# Altium PCB MCS_adapter.PcbDoc
Units mil, origin at the board's own origin, x right, y up, seen from the top; angles counter-clockwise.
Board outline 2775 x 1700 mil, 4 copper layers (Top Copper Layer, Internal Copper Layer 1, Internal Copper Layer 2, Bottom Copper Layer), stack 62.205 mil thick; 13 components, 93 nets, 230 pads, 28 vias.
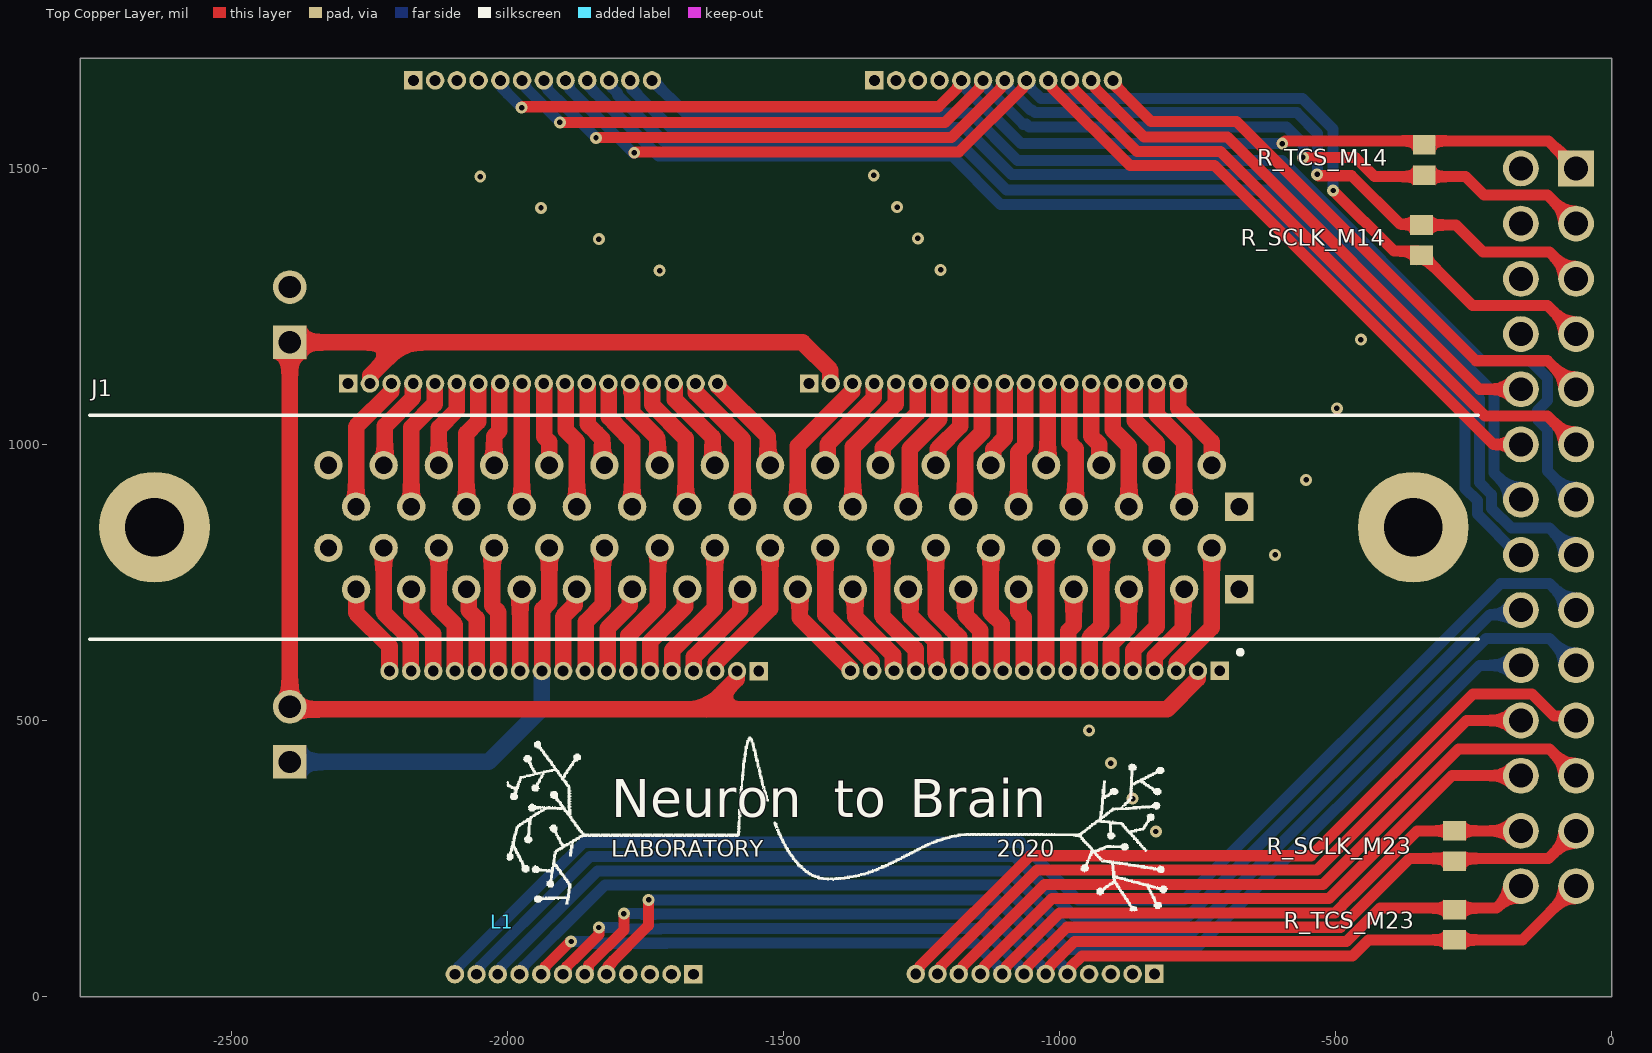
[diagram p0: Top Copper Layer view]
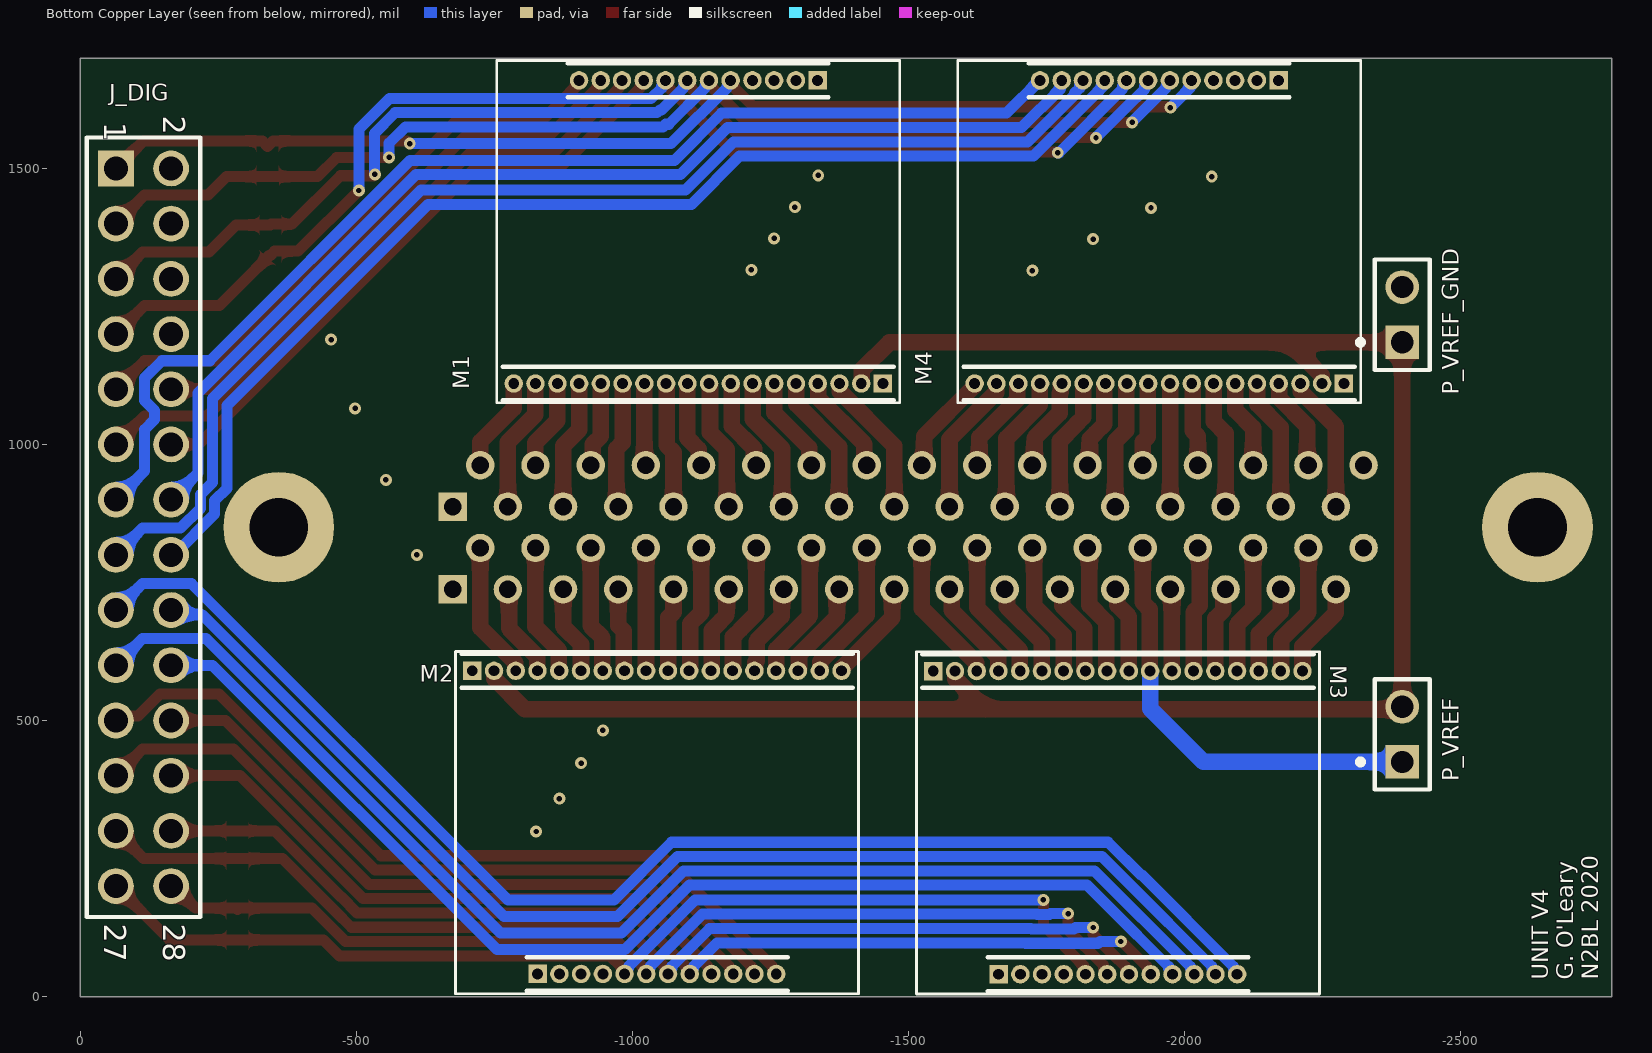
[diagram p1: Bottom Copper Layer view, seen from below]
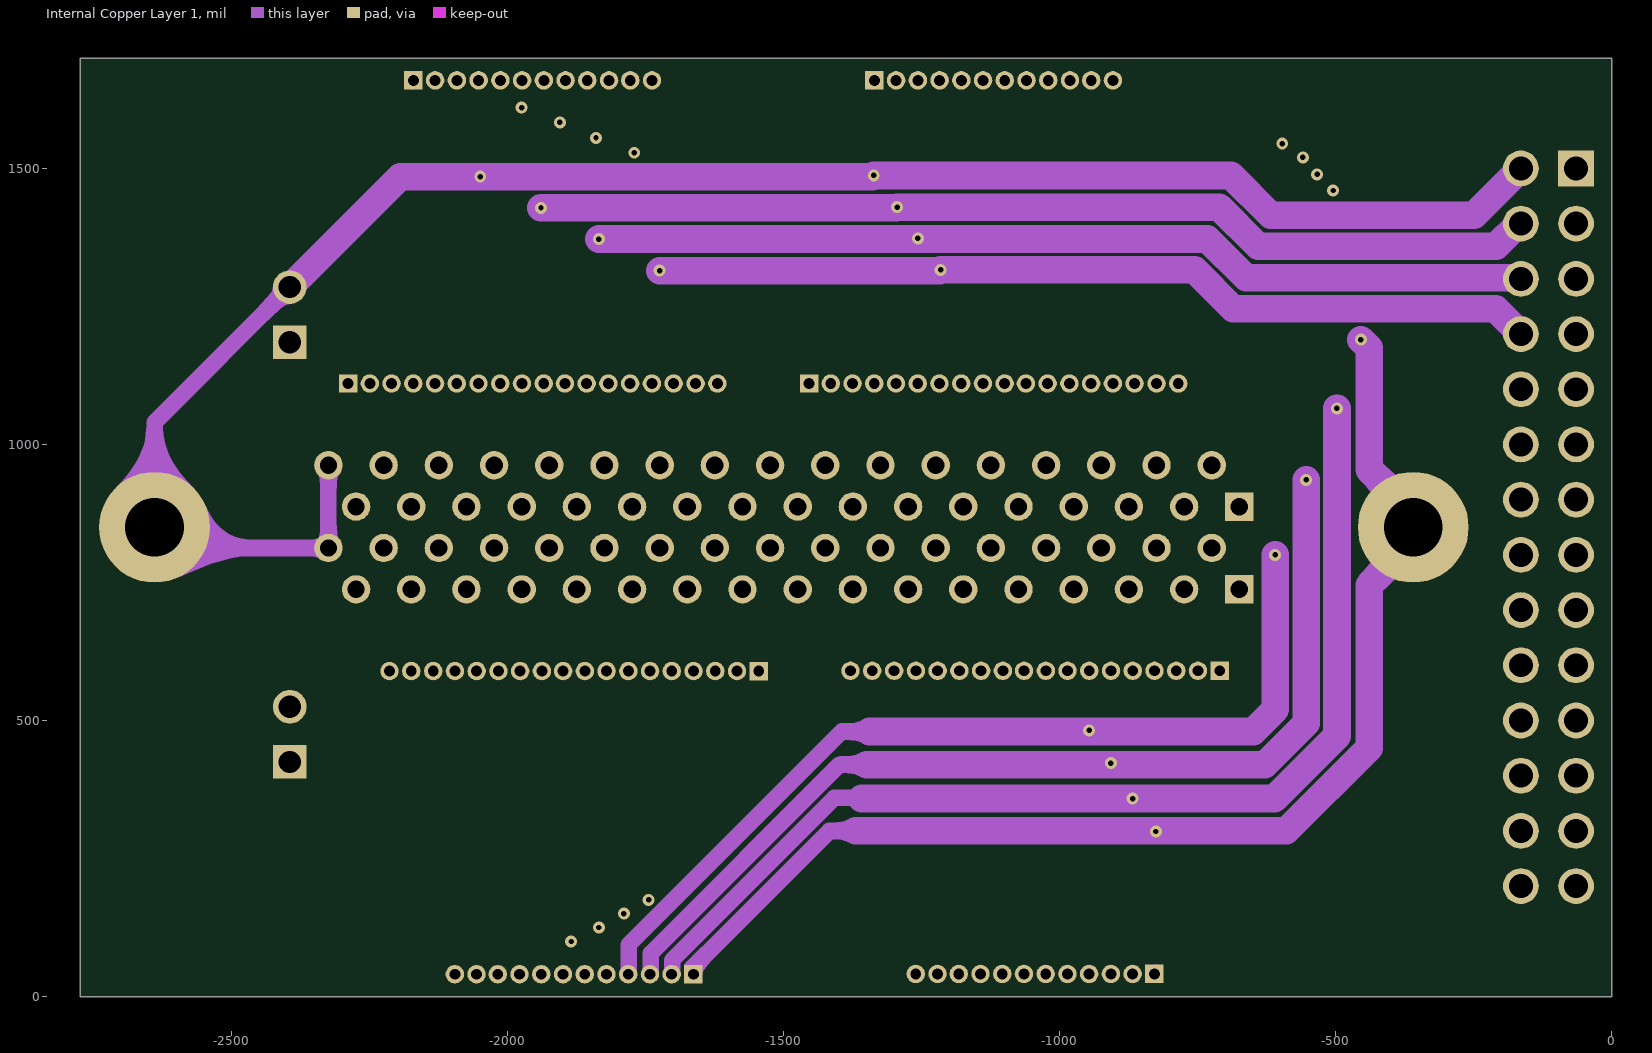
[diagram p2: Internal Copper Layer 1]
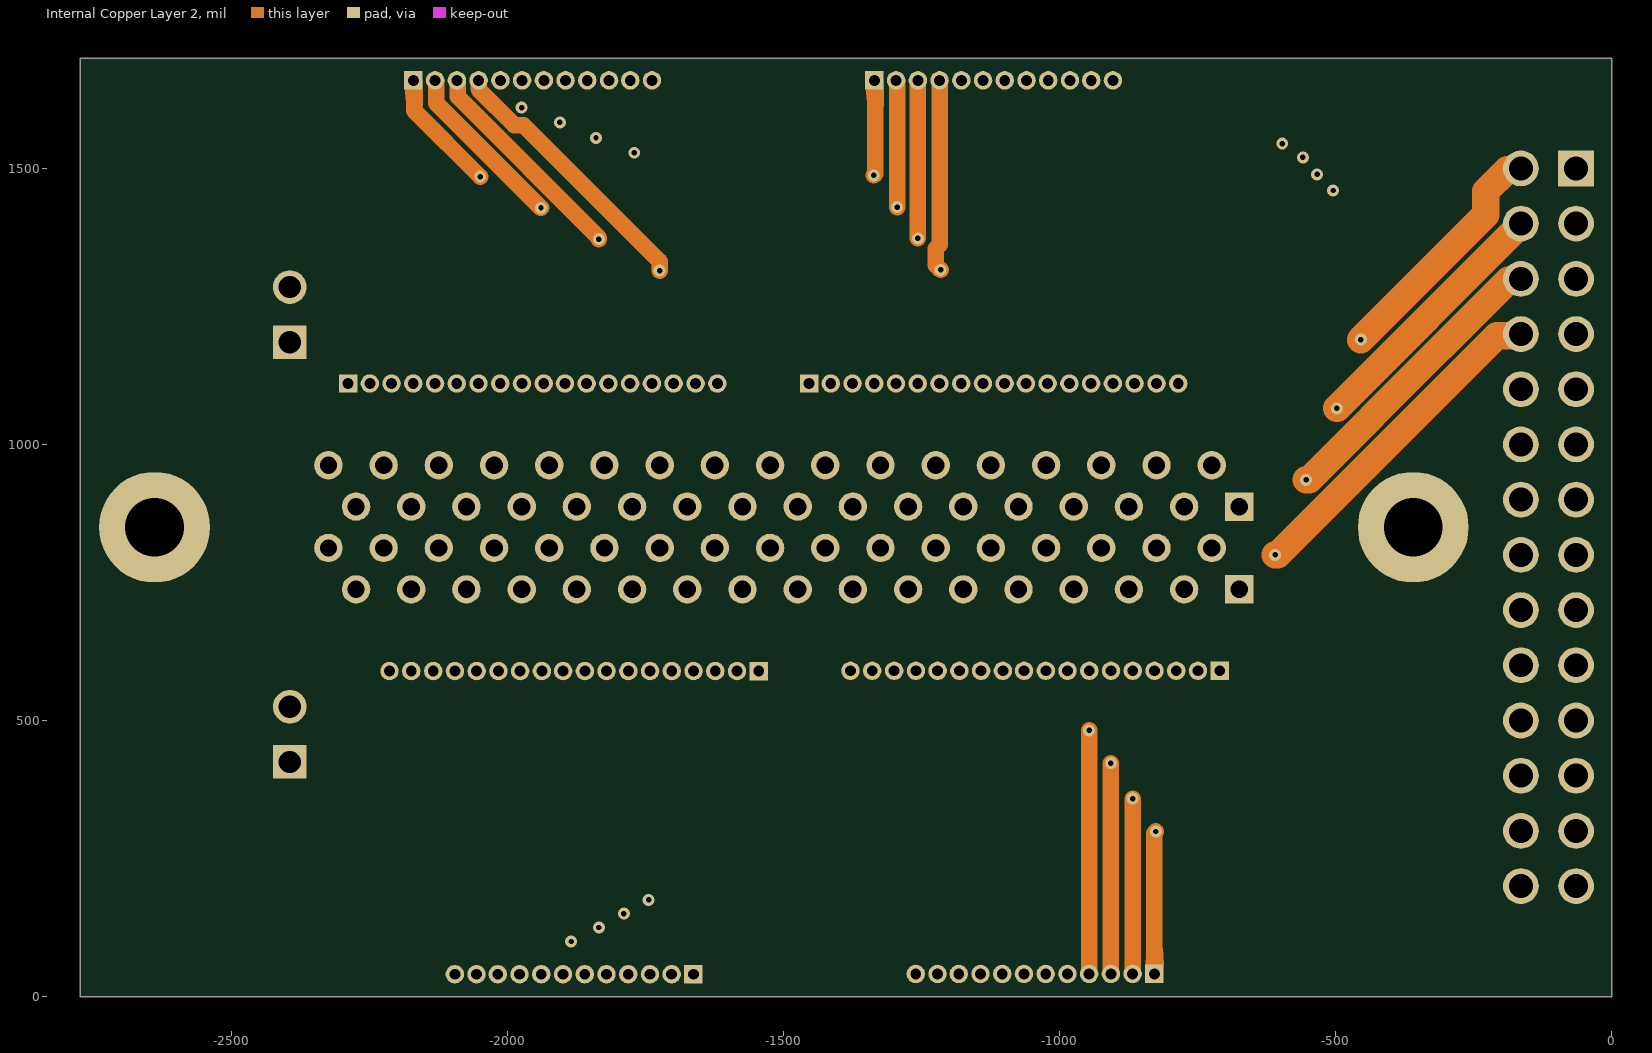
[diagram p3: Internal Copper Layer 2]
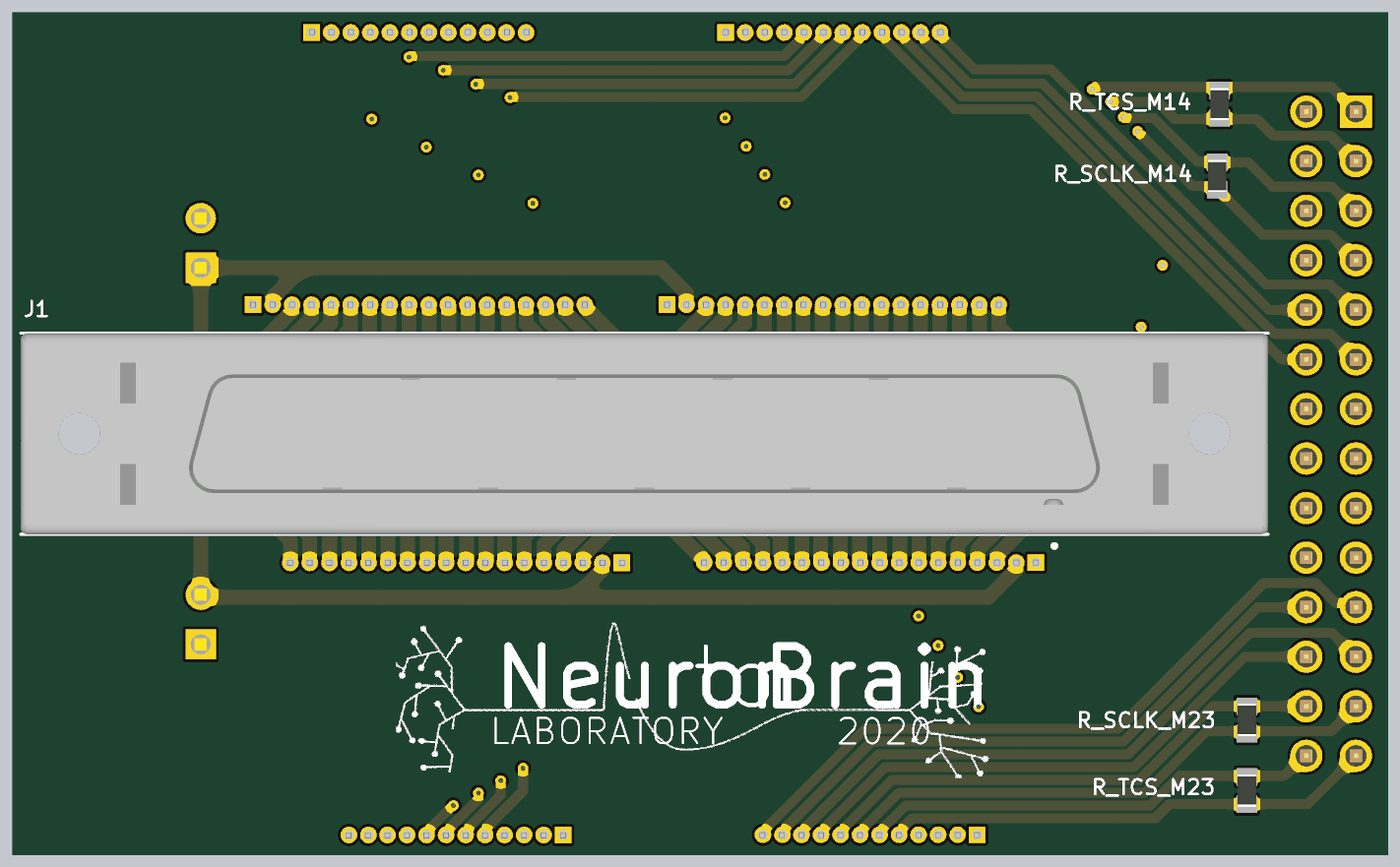
[diagram p4: 3D render of the assembled board from above, using the file's embedded part models]
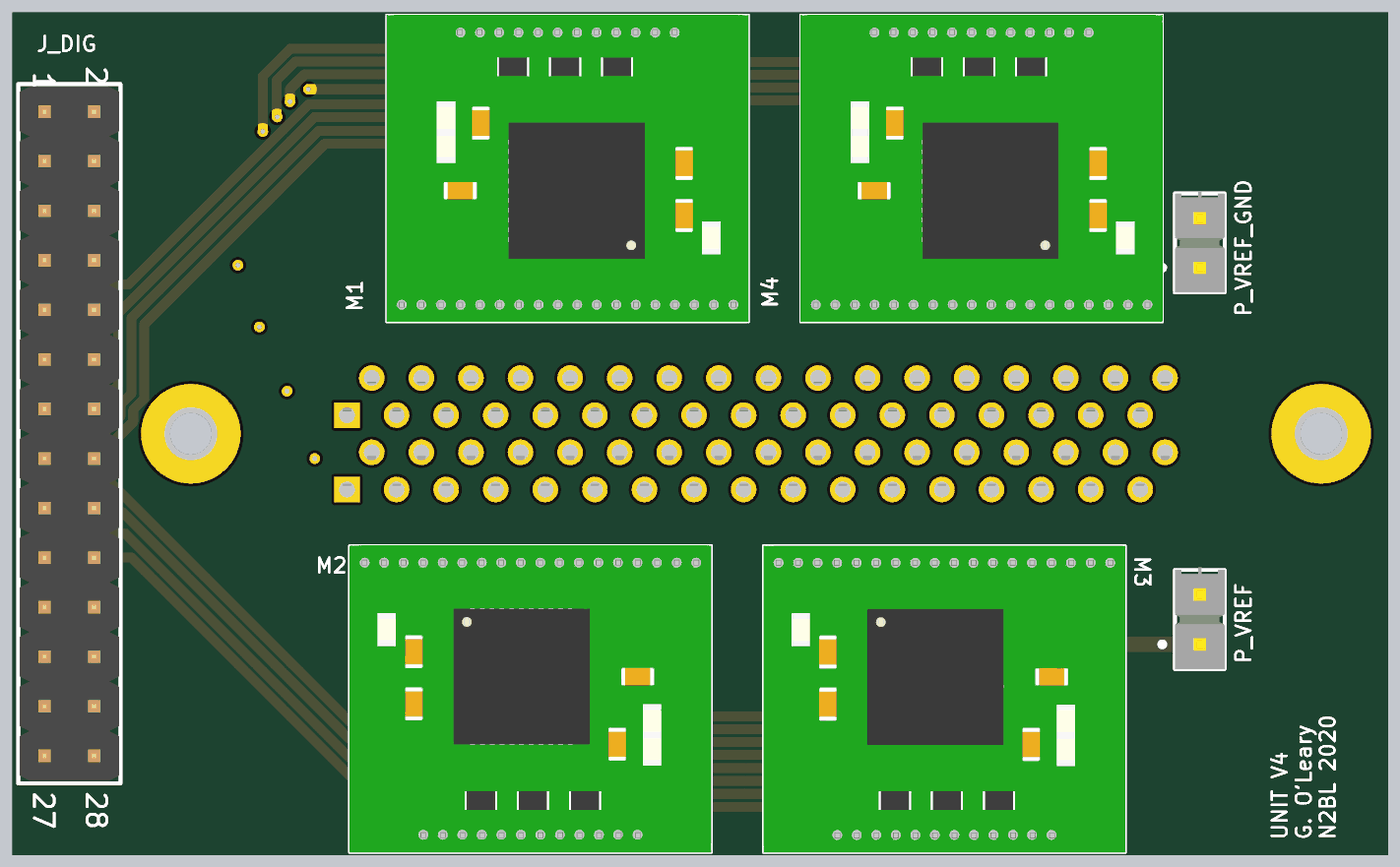
[diagram p5: 3D render of the assembled board from below, using the file's embedded part models]

## Layer stack, top to bottom
Top Solder: solder mask 0.3937, Solder Resist, Dk 3.5
Top Copper Layer: signal copper 1.378
Dielectric 1: prepreg 8.6614, FR-4, Dk 4.2
Internal Copper Layer 1: signal copper 1.378
Dielectric 2: core 39.3701, FR-4, Dk 4.2
Internal Copper Layer 2: signal copper 1.378
Dielectric 3: prepreg 8.6614, FR-4, Dk 4.2
Bottom Copper Layer: signal copper 1.378
Bottom Solder: solder mask 0.3937, Solder Resist, Dk 3.5

## Board outline
-2775,0 0,0 0,1700 -2775,1700

## Design rules (kind name [scope] priority, off if disabled: settings)
BoardOutlineClearance [All] p1: gap=15.75 ignorepadtopadclearanceinfootprint=FALSE
Clearance [All] p1: gap=5.91 ignorepadtopadclearanceinfootprint=TRUE
ComponentClearance [All] p1: gap=5.91 collisioncheckmode=3 verticalgap=5.91 showdistances=FALSE
HoleSize [All] p1: absolutevalues=TRUE maxlimit=15.75 minlimit=9.84 maxpercent=80.000 minpercent=20.000
HoleToHoleClearance [All] p1: gap=17.72 allowstackedmicrovias=TRUE
MinimumAnnularRing [All] p1: minimumring=5.91
MinimumSolderMaskSliver [All] p1: minsoldermaskwidth=5.91
PlaneClearance [All] p1: clearance=5.91
PlaneConnect [All] p1: planeconnectstyle=Relief reliefexpansion=9.84 reliefentries=4 reliefconductorwidth=5.91 reliefairgap=5.91
PolygonConnect [All] p1: connectstyle=Relief reliefconductorwidth=5.91 reliefentries=4 polygonreliefangle="90 Angle" airgapwidth=5.91
RoomDefinition MCS_adapter [InComponentClass('MCS_adapter')] p1 off: confinementstyle=ConfineIn formatcopy=TRUE lockcomponents=FALSE outline -7000,-1000 -5000,-1000 -5000,0 -7000,0
RoutingVias [All] p1: holewidth=9.84 width=21.65 viastyle="Through Hole" minholewidth=9.84 minwidth=21.65 maxholewidth=15.75 maxwidth=31.5
SilkToSilkClearance [All] p1: silktosilkclearance=7.87
SilkToSolderMaskClearance [IsPad] p1: minsilkscreentomaskgap=7.87 clearancetoexposedcopper=TRUE
SolderMaskExpansion [All] p1: expansion=5.91 istentingtop=FALSE
Width [All] p1: maxlimit=1968.5 minlimit=5.91 preferedwidth=5.91
22 further rules are at their usual default settings.

## Classes and differential pairs
net class SIG[0..63]: SIG0 SIG1 SIG2 SIG3 SIG4 SIG5 SIG6 SIG7 SIG8 SIG9 SIG10 SIG11 SIG12 SIG13 SIG14 SIG15 SIG16 SIG17 SIG18 SIG19 SIG20 SIG21 SIG22 SIG23 SIG24 SIG25 SIG26 SIG27 SIG28 SIG29 SIG30 SIG31 SIG32 SIG33 SIG34 SIG35 SIG36 SIG37 SIG38 SIG39 SIG40 SIG41 SIG42 SIG43 SIG44 SIG45 SIG46 SIG47 SIG48 SIG49 SIG50 SIG51 SIG52 SIG53 SIG54 SIG55 SIG56 SIG57 SIG58 SIG59 SIG60 SIG61 SIG62 SIG63
component class MCS_adapter: J1 J_DIG M1 M2 M3 M4 P_VREF P_VREF_GND R_SCLK_M14 R_SCLK_M23 R_TCS_M14 R_TCS_M23

## Components (designator, comment, footprint, x,y, rotation, side; value= is the part's Value field where it differs from the comment)
J1 "Connector 68" CONN_2-5174339-5_2-5174339-5(Primary) -1500,850 r180 top
J_DIG "61302821121" 61302821121 -115,850 r270 bottom
L1 "Logo" N2BL_Logo -2010,135 r0 top
M1 "Intan_RHS2116_Module" INTAN_RHS2116_MODULE -1120,1385 r0 bottom
M2 "Intan_RHS2116_Module" INTAN_RHS2116_MODULE -1045,315.41 r180 bottom
M3 "Intan_RHS2116_Module" INTAN_RHS2116_MODULE -1880,315 r180 bottom
M4 "Intan_RHS2116_Module" INTAN_RHS2116_MODULE -1955,1385 r0 bottom
P_VREF "TSW-102-07-S-S" SMTC-TSW-102-07-S-S -2395,475 r90 bottom
P_VREF_GND "TSW-102-07-S-S" SMTC-TSW-102-07-S-S -2395,1235 r90 bottom
R_SCLK_M14 "CRCW0603100RFKEA" RESC1609X50X30ML8T20 -345,1370 r270 top
R_SCLK_M23 "CRCW0603100RFKEA" RESC1609X50X30ML8T20 -285,272.44 r90 top
R_TCS_M14 "CRCW0603100RFKEA" RESC1609X50X30ML8T20 -340,1515 r270 top
R_TCS_M23 "CRCW0603100RFKEA" RESC1609X50X30ML8T20 -285,130 r90 top

## Footprints (in the part's own frame and the unit in brackets; to place one, negate y for a bottom-side part, rotate by r counter-clockwise, add the part's x,y. Pads: shape width x height; smd on the part's side, far side on the other; paste and mask are expansions set on the pad)
61302821121 [mm] "Pin Header, pitch 2.54 mm, THT, Vertical, dual row, 28p"
  rect 1.65x1.65 hole 1.1: 1(-16.51,-1.27)
  round 1.65 hole 1.1: 2(-16.51,1.27) 3(-13.97,-1.27) 4(-13.97,1.27) 5(-11.43,-1.27) 6(-11.43,1.27) 7(-8.89,-1.27) 8(-8.89,1.27) 9(-6.35,-1.27) 10(-6.35,1.27) 11(-3.81,-1.27) 12(-3.81,1.27) 13(-1.27,-1.27) 14(-1.27,1.27) 15(1.27,-1.27) 16(1.27,1.27) 17(3.81,-1.27) 18(3.81,1.27) 19(6.35,-1.27) 20(6.35,1.27) 21(8.89,-1.27) 22(8.89,1.27) 23(11.43,-1.27) 24(11.43,1.27) 25(13.97,-1.27) 26(13.97,1.27) 27(16.51,-1.27) 28(16.51,1.27)
  silkscreen extent -17.93,-2.62 17.93,2.62, body extent -17.78,-2.54 17.78,2.54, height 8.59
CONN_2-5174339-5_2-5174339-5(Primary) [mm] "68 Position D-Type Cap, Male Pins Connector"
  round 1.308 hole 0.8: 1(20.955,0.953) 2(19.685,2.858) 3(18.415,0.953) 4(17.145,2.858) 5(15.875,0.953) 6(14.605,2.858) 7(13.335,0.953) 8(12.065,2.858) 9(10.795,0.953) 10(9.525,2.858) 11(8.255,0.953) 12(6.985,2.858) 13(5.715,0.953) 14(4.445,2.858) 15(3.175,0.953) 16(1.905,2.858) 17(0.635,0.953) 18(-0.635,2.857) 19(-1.905,0.952) 20(-3.175,2.857) 21(-4.445,0.952) 22(-5.715,2.857) 23(-6.985,0.952) 24(-8.255,2.857) 25(-9.525,0.952) 26(-10.795,2.857) 27(-12.065,0.952) 28(-13.335,2.857) 29(-14.605,0.952) 30(-15.875,2.857) 31(-17.145,0.952) 32(-18.415,2.857) 33(-19.685,0.952) 35(20.955,-2.857) 36(19.685,-0.952) 37(18.415,-2.857) 38(17.145,-0.952) 39(15.875,-2.857) 40(14.605,-0.952) 41(13.335,-2.857) 42(12.065,-0.952) 43(10.795,-2.857) 44(9.525,-0.952) 45(8.255,-2.857) 46(6.985,-0.952) 47(5.715,-2.857) 48(4.445,-0.952) 49(3.175,-2.857) 50(1.905,-0.952) 51(0.635,-2.857) 52(-0.635,-0.953) 53(-1.905,-2.858) 54(-3.175,-0.953) 55(-4.445,-2.858) 56(-5.715,-0.953) 57(-6.985,-2.858) 58(-8.255,-0.953) 59(-9.525,-2.858) 60(-10.795,-0.953) 61(-12.065,-2.858) 62(-13.335,-0.953) 63(-14.605,-2.858) 64(-15.875,-0.953) 65(-17.145,-2.858) 66(-18.415,-0.953) 67(-19.685,-2.858)
  rect 1.308x1.308 hole 0.8: 34(-20.955,2.857) 68(-20.955,-0.953)
  round 5.1 hole 2.7: 69(28.955,0) 70(-28.955,0)
  silkscreen extent -31.95,-5.15 31.95,5.85, body extent -31.95,-5.15 31.96,5.15, height 9.3
INTAN_RHS2116_MODULE [mm]
  rect 0.85x0.85 hole 0.5: 1(-5.488,-6.974) 13(-8.494,6.975)
  round 0.85 hole 0.5: 2(-4.488,-6.974) 3(-3.488,-6.974) 4(-2.488,-6.974) 5(-1.488,-6.974) 6(-0.488,-6.974) 7(0.512,-6.974) 8(1.512,-6.974) 9(2.512,-6.974) 10(3.512,-6.974) 11(4.489,-6.974) 12(5.489,-6.974) 14(-7.494,6.975) 15(-6.494,6.975) 16(-5.494,6.975) 17(-4.494,6.975) 18(-3.494,6.975) 19(-2.494,6.975) 20(-1.494,6.975) 21(-0.494,6.975) 22(0.506,6.975) 23(1.483,6.975) 24(2.483,6.975) 25(3.483,6.975) 26(4.483,6.975) 27(5.483,6.975) 28(6.483,6.975) 29(7.494,6.975) 30(8.494,6.975)
  Top Copper Layer lines w0.254: -0.494,6.975 -0.38,6.86 ; 1.483,6.975 1.483,6.813 ; 4.483,6.975 4.483,6.884 ; 5.463,6.955 5.483,6.975
  Top Copper Layer lines w0.381: -1.443,-6.892 -1.443,-6.974 ; -0.443,-6.892 -0.443,-6.974 ; 0.467,-6.885 0.557,-6.974 ; 1.467,-6.885 1.557,-6.974 ; 3.526,-6.944 3.557,-6.974
  Internal Copper Layer 1 lines w0.635: -5.551,-6.867 -5.443,-6.974 ; -4.484,-6.933 -4.443,-6.974 ; -3.443,-6.916 -3.443,-6.974
  Internal Copper Layer 1 lines w0.762: -2.46,-6.958 -2.443,-6.974
  silkscreen extent -9.27,-7.88 9.27,7.86, body extent -9.27,-7.88 9.27,7.86, height 3.2
N2BL_Logo [mil] "Example template footprint"
  silkscreen extent 8,19 1205,335
RESC1609X50X30ML8T20 [mm] "Chip Resistor, 2-Leads, Body 1.65x0.95mm, IPC Low Density"
  rect 0.9x1.05 smd: 1(-0.7,0) 2(0.7,0)
  body extent -0.82,-0.48 0.82,0.48, height 0.5
SMTC-TSW-102-07-S-S [mm] "Header, 2-Leads, Body 5.08x2.54mm, Pitch 2.54mm"
  rect 1.55x1.55 hole 1.02: 1(-1.27,0)
  round 1.55 hole 1.02: 2(1.27,0)
  silkscreen extent -2.54,-1.27 2.54,2.04, body extent -2.54,-1.27 2.67,1.27, height 8.38

## Part data
J1: "Receptacle Header Assemby", Manufacturer="TE Connectivity", ManufacturerPartNumber=2-5174339-5, Supplier Part Number 1=A121355-ND, ComponentLink1Description=Datasheet, ComponentLink1URL=https://www.te.com/commerce/DocumentDelivery/DDEController?Action=srchrtrv&DocNm=5174339&DocType=Customer+Drawing&DocLang=English, Manufacturer Link=https://www.te.com/usa-en/product-2-5174339-5.html#pdp-docs-features, Pricing1="1=29.61;  10=26.727;  25=25.60760;  50=24.007  (CAD)", Stock1=1335, Supplier 1=Digi-Key, Supplier Link 1=https://www.digikey.ca/product-detail/en/te-connectivity-amp-connectors/2-5174339-5/A121355-ND/1835651
J_DIG: library part CMP-1502-01115-1, "THT Vertical Pin Header WR-PHD, Pitch 2.54 mm, Dual Row, 28 pins", Contact Resistance=20mOhm, Manufacturer="Wurth Elektronik", Operating Temperature=-40to105degC, Rated Current=3A, Withstanding Voltage=500VAC, Working Voltage=250VAC, Datasheet URL=https://katalog.we-online.de/em/datasheet/6130xx21121.pdf, Gender=Male, Manufacturer URL=http://www.we-online.de, Mounting Technology=THT, Orientation=Vertical, Package Reference=61302821121, Packaging=Bag, Part Number=61302821121, Pin Number=28, Pitch=2.54mm, Publisher=WurthElektronik, Row Number=Dual
L1: library part "Neuron To Brain Lab Logo"
P_VREF P_VREF_GND: library part CMP-1681-00004-4, "Male Header, Pitch 2.54 mm, 1 x 2 Position, Height 8.38 mm, Tail Length 2.54 mm, -55 to 125 degC, RoHS, Bulk", Colour=Black, Manufacturer=Samtec, Max Operating Temperature="125 degC", Min Operating Temperature="-55 degC", Package Quantity=1, ComponentLink1Description="Manufacturer URL", ComponentLink1URL=http://www.samtec.com/, ComponentLink2Description=Datasheet, ComponentLink2URL=http://suddendocs.samtec.com/catalog_english/tsw_th.pdf, Contact Finish=Gold, Contact Material=Bronze, Contact Plating=Gold, DatasheetVersion=12/2015, Height="8.38 mm", Lead Pitch="0.1 inch", Length="5.08 mm", Mount="Through Hole", Mounting Technology="Through Hole", PackageDescription="Male Header, Pitch 2.54 mm, 1 x 2 Position, Height 8.38 mm, Tail Length 2.54 mm", PackageReference=TSW-102-07-S-S, Packaging=Bulk, Pins=2, REACH SVHC="No SVHC", RoHSCompliant=true, Rows=1
R_SCLK_M14 R_SCLK_M23 R_TCS_M14 R_TCS_M23: library part CMP-1666-00008-4, "Chip Resistor, 100 Ohm, +/- 1%, 100 mW,-55 to 155 degC, 0603 (1608 Metric), RoHS, Tape and Ree", Manufacturer="Vishay Semiconductor", ComponentLink1Description="Manufacturer URL", ComponentLink1URL=http://www.vishay.com/, ComponentLink2Description=Datasheet, ComponentLink2URL=http://www.vishay.com/docs/20035/dcrcwe3.pdf, DatasheetVersion=06/2012, Mounting Technology="Surface Mount", PackageDescription="2-Pin Surface Mount Device, Body 1.575 x 0.85 mm", PackageReference=0603

## Via types
v1: diameter 21.65, hole 9.84, Top Copper Layer to Bottom Copper Layer, 28 vias

## Nets (pads, with @x,y where several pads share a name; then routed paths per layer and width w, separated by ;. In a path a pad name is that pad's centre, name@x,y a point inside that pad or via, vN(x,y) a via of type N, cw(c..) or ccw(c..) an arc to the next point about the centre after c; other vN are vias at no path point)
GND: J1.1 J1.35 J1.69 J1.70 J_DIG.2 M1.1 M2.1 M3.1 M4.1 P_VREF_GND.2 | length 6871.5
  Internal Copper Layer 1 w30: P_VREF_GND.2 -2639.96,1040.04 J1.69 -2593.75,850 -2556.25,812.5 J1.1 J1.35 ; M3.1 -1662.19,42.15 -1662.19,55.48 -1417.67,300 -1370,300 ; v1(-826.08,298.92) v1@-825,300 ; J1.70@-440,855 -365.04,855 J1.70 -430,850 J1.70@-435,845
  Internal Copper Layer 1 w50: P_VREF_GND.2 -2195,1485 v1(-2050,1485) -1339.53,1485 v1(-1337.26,1487.26) -690.08,1487.26 -617.81,1415 -250,1415 J_DIG.2 ; -1370,300 -825,300 -590,300 -440,450 -440,745.32 -360.04,825.28 J1.70 -360.04,874.72 -440,954.68 -440,1175 v1(-455,1190)
  Internal Copper Layer 2 w30: M4.1 -2169.35,1657.85 -2169.35,1604.35 v1(-2050,1485) ; v1(-1337.26,1487.26) -1334.35,1490.18 -1334.35,1657.85 M1.1 ; M2.1 -828.92,296.08 v1(-826.08,298.92)
  Internal Copper Layer 2 w50: v1(-455,1190) -228.39,1416.61 -228.39,1458.49 -189.74,1497.14 -167.86,1497.14 J_DIG.2
M1_MISON: J_DIG.10 M1.11 | length 1014.1
  Top Copper Layer w20: M1.11 -943.29,1655.94 -936.56,1649.21 -936.56,1646.07 -847.3,1556.81 -696.81,1556.81 -240,1100 J_DIG.10
M1_MISOP: J_DIG.9 M1.12 | length 1074
  Top Copper Layer w20: M1.12 -903.92,1655.94 -897.18,1649.21 -897.18,1647.18 -835,1585 -680,1585 -246.61,1151.61 -116.61,1151.61 J_DIG.9
M1_MOSIN: J_DIG.12 M1.9 | length 1133.3
  Top Copper Layer w20: M1.9 -1021.12,1655.94 -1014.39,1649.21 -1014.39,1646.07 -873.32,1505 -720,1505 -215,1000 J_DIG.12
M1_MOSIP: J_DIG.11 M1.10 | length 1194.5
  Top Copper Layer w20: M1.10 -981.75,1655.94 -975.93,1650.12 -975.93,1646.07 -860.76,1530.91 -709.27,1530.91 -229.98,1051.61 -116.61,1051.61 J_DIG.11
M2_MISON: J_DIG.22 M2.11 | length 1251.4
  Top Copper Layer w20: M2.11 -1221.71,44.47 -1215.89,50.3 -1215.89,54.35 -1041.14,229.09 -534.27,229.09 -263.36,500 J_DIG.22
M2_MISOP: J_DIG.21 M2.12 | length 1430.3
  Top Copper Layer w20: M2.12 -1261.08,44.47 -1254.35,51.2 -1254.35,54.35 -1053.7,255 -545,255 -251.61,548.39 -144.96,548.39 -104.97,508.39 -73.39,508.39 J_DIG.21
M2_MOSIN: J_DIG.24 M2.9 | length 1131.6
  Top Copper Layer w20: M2.9 -1143.88,44.47 -1137.15,51.2 -1137.15,54.35 -1014.21,177.28 -512.81,177.28 -290.09,400 J_DIG.24
M2_MOSIP: J_DIG.23 M2.10 | length 1311.1
  Top Copper Layer w20: M2.10 -1183.25,44.47 -1176.52,51.2 -1176.52,54.35 -1027.67,203.19 -523.54,203.19 -278.34,448.39 -113.39,448.39 J_DIG.23
M3_MISON: J_DIG.18 M3.11 | length 2259.3
  Bottom Copper Layer w20: M3.11 -2056.71,44.06 -2050.89,49.88 -2050.89,53.93 -1894.82,210 -1851.27,253.54 -1082.42,253.54 -973.88,145 -768.27,145 -221.87,691.4 -173.6,691.4 J_DIG.18
M3_MISOP: J_DIG.17 M3.12 | length 2434.9
  Bottom Copper Layer w20: M3.12 -2096.08,44.06 -2089.35,50.79 -2089.35,53.93 -1923.28,220 -1921.45,220 -1862.01,279.45 -1071.69,279.45 -967.24,175 -774.91,175 -201.52,748.39 -113.39,748.39 J_DIG.17
M3_MOSIN: J_DIG.20 M3.9 | length 2146.3
  Bottom Copper Layer w20: M3.9 -1978.88,44.06 -1972.15,50.79 -1972.15,53.93 -1861.08,165 -1824.35,201.73 -1103.88,201.73 -987.15,85 -755,85 -240,600 J_DIG.20
M3_MOSIP: J_DIG.19 M3.10 | length 2322.4
  Bottom Copper Layer w20: M3.10 -2018.25,44.06 -2011.52,50.79 -2011.52,53.93 -1837.81,227.64 -1093.15,227.64 -980.51,115 -761.64,115 -228.25,648.39 -113.39,648.39 J_DIG.19
M4_MISON: J_DIG.14 M4.11 | length 2020.4
  Bottom Copper Layer w20: M4.11 -1775.71,1657.01 -1775.71,1644.08 -1705.73,1574.09 -1173.17,1574.09 -1087.91,1488.83 -608.83,1488.83 -213.39,1093.39 -213.39,948.39 J_DIG.14
M4_MISOP: J_DIG.13 M4.12 | length 2102.4
  Bottom Copper Layer w20: M4.12 -1738.1,1659.59 -1678.52,1600 -1162.44,1600 -1077.18,1514.74 -598.1,1514.74 -234.98,1151.61 -148.19,1151.61 -116.61,1120.04 -116.61,1079.96 -135,1061.57 -135,1045 -116.61,1026.61 -116.61,951.61 J_DIG.13
M4_MOSIN: J_DIG.16 M4.9 | length 2154.6
  Bottom Copper Layer w20: M4.9 -1856.12,1655.94 -1849.39,1649.21 -1849.39,1644.48 -1727.19,1522.28 -1194.63,1522.28 -1107.35,1435 -630,1435 -265.91,1070.91 -265.91,920.34 -243.74,898.17 -243.74,873.68 -170.06,800 J_DIG.16
M4_MOSIP: J_DIG.15 M4.10 | length 2217.9
  Bottom Copper Layer w20: M4.10 -1816.75,1655.94 -1810.93,1650.12 -1810.93,1646.07 -1801.62,1636.76 -1801.62,1633.34 -1716.46,1548.19 -1183.9,1548.19 -1096.62,1460.91 -617.54,1460.91 -240,1083.36 -240,931.07 -217.83,908.9 -217.83,884.41 -181.81,848.39 -113.39,848.39 J_DIG.15
M14_CSN: J_DIG.1 M1.5 M4.5 R_TCS_M14.1 | length 2082.4
  Top Copper Layer w20: v1(-1975,1610) -1973.27,1611.73 -1219.67,1611.73 -1185.33,1646.07 -1185.33,1649.21 -1178.6,1655.94 M1.5 ; v1(-597.25,1545.06) -596.8,1545.06 -591.86,1550 -349.88,1550 -340,1540.12 -330.12,1550 -115,1550 J_DIG.1
  Bottom Copper Layer w20: M4.5 -2011.82,1657.8 -2011.82,1656.34 -2011.82,1646.82 v1(-1975,1610) ; M1.5 -1178.6,1655.94 -1171.87,1649.21 -1171.87,1646.07 -1070.86,1545.06 v1(-597.25,1545.06)
M14_CSP: J_DIG.3 M1.6 M4.6 R_TCS_M14.2 | length 2107.2
  Top Copper Layer w20: v1(-1905.87,1583.57) -1208.46,1583.57 -1145.96,1646.07 -1145.96,1649.21 -1139.23,1655.94 M1.6 ; v1(-560,1520) -465,1520 -430,1485 -340,1485 -265,1485 -231.61,1451.61 -116.61,1451.61 J_DIG.3
  Bottom Copper Layer w20: M4.6 -1972.45,1657.8 -1972.45,1654.16 -1967.5,1649.21 -1967.5,1646.07 -1948.38,1626.95 -1905.87,1584.44 v1(-1905.87,1583.57) ; M1.6 -1139.23,1655.94 -1132.5,1649.21 -1132.5,1646.07 -1066.43,1580 -1060.96,1580 -1056.1,1575.14 -589.52,1575.14 -560,1545.61 v1(-560,1520)
M14_SCLKN: J_DIG.5 M1.7 M4.7 R_SCLK_M14.1 | length 2163.8
  Top Copper Layer w20: v1(-1840.32,1555.32) -1839.73,1555.91 -1196.76,1555.91 -1106.59,1646.07 -1106.59,1649.21 -1099.86,1655.94 M1.7 ; v1(-534.23,1489.23) -531.73,1486.73 -471.73,1486.73 -383.95,1398.95 -346.39,1398.95 R_SCLK_M14.1 -282.56,1397.56 -233.39,1348.39 -113.39,1348.39 J_DIG.5
  Bottom Copper Layer w20: M4.7 -1934.86,1657.8 -1934.86,1655.94 -1928.13,1649.21 -1928.13,1643.33 -1895.1,1610.31 -1894.8,1610.31 -1840.32,1555.83 v1(-1840.32,1555.32) ; M1.7 -1099.86,1657.8 -1099.86,1655.94 -1093.13,1649.21 -1093.13,1646.07 -1052.97,1605.91 -1050.23,1605.91 -1045.37,1601.04 -570.97,1601.04 -533.27,1563.34 -533.27,1490.2 v1(-534.23,1489.23)
M14_SCLKP: J_DIG.7 M1.8 M4.8 R_SCLK_M14.2 | length 2209.1
  Top Copper Layer w20: v1(-1771.09,1528.38) -1769.47,1530 -1183.29,1530 -1067.22,1646.07 -1067.22,1649.21 -1060.49,1655.94 M1.8 ; v1(-505,1460) -395.16,1350.16 -352.72,1350.16 R_SCLK_M14.2 -342.05,1342.44 -334.33,1334.72 -334.33,1333.25 -252.7,1251.61 -116.61,1251.61 J_DIG.7
  Bottom Copper Layer w20: M4.8 -1895.49,1657.8 -1895.49,1655.94 -1888.76,1649.21 -1888.76,1643.76 -1773.38,1528.38 v1(-1771.09,1528.38) ; M1.8 -1060.49,1657.8 -1060.49,1655.94 -1053.76,1649.21 -1053.76,1646.07 -1034.64,1626.95 -560.24,1626.95 -505,1571.71 v1(-505,1460)
M23_CSN: J_DIG.27 M2.5 M3.5 R_TCS_M23.1 | length 1975.7
  Top Copper Layer w20: M3.5 -1818.82,42.99 -1818.82,55.24 -1745,129.07 v1(-1745,175) ; M2.5 -986.4,44.47 -979.67,51.2 -979.67,54.35 -960.35,73.66 -469.89,73.66 -441.11,102.44 R_TCS_M23.1 -162.56,102.44 J_DIG.27
  Bottom Copper Layer w20: v1(-1745,175) -1113.78,175 -993.13,54.35 -993.13,51.2 -986.4,44.47 M2.5
M23_CSP: J_DIG.28 M2.6 M3.6 R_TCS_M23.2 | length 1889.5
  Top Copper Layer w20: M3.6 -1860.77,44.06 -1854.04,50.79 -1854.04,56.67 -1790,120.7 v1(-1790,150) ; M2.6 -1025.77,44.47 -1019.04,51.2 -1019.04,54.35 -973.81,99.57 -480.62,99.57 -451.84,128.35 -451.65,128.35 -420,160 -287.44,160 R_TCS_M23.2 -282.56,160 -209.2,160 -169.2,200 J_DIG.28
  Bottom Copper Layer w15: M3.6 M3.6@-1860.77,44.23
  Bottom Copper Layer w20: v1(-1790,150) -1757.81,150 -1756.07,148.27 -1733.93,148.27 -1733.1,149.09 -1127.25,149.09 -1032.5,54.35 -1032.5,51.2 -1025.77,44.47 M2.6
M23_SCLKN: J_DIG.25 M2.7 M3.7 R_SCLK_M23.1 | length 2032.4
  Top Copper Layer w20: M3.7 -1900.14,44.06 -1893.41,50.79 -1893.41,53.93 -1871.5,75.84 -1835,112.34 v1(-1835,125) ; M2.7 -1065.14,44.47 -1058.41,51.2 -1058.41,54.35 -987.28,125.47 -491.35,125.47 -462.57,154.25 -462.38,154.25 -366.64,250 -285,250 -115,250 J_DIG.25
  Bottom Copper Layer w20: v1(-1835,125) -1802.81,125 -1800.17,122.36 -1723.2,122.36 -1722.37,123.19 -1140.71,123.19 -1071.87,54.35 -1071.87,51.2 -1065.14,44.47 -1065.14,42.61 M2.7
M23_SCLKP: J_DIG.26 M2.8 M3.8 R_SCLK_M23.2 | length 1941.9
  Top Copper Layer w20: M3.8 -1939.51,44.06 -1932.78,50.79 -1932.78,53.93 -1887.02,99.68 v1(-1885.46,99.68) ; M2.8 -1104.51,44.47 -1097.78,51.2 -1097.78,54.35 -1000.74,151.38 -502.08,151.38 -473.3,180.16 -473.11,180.16 -353.27,300 -320,300 R_SCLK_M23.2 J_DIG.26
  Bottom Copper Layer w15: M2.8 M2.8@-1104.51,42.61
  Bottom Copper Layer w20: v1(-1885.46,99.68) -1847.49,99.68 -1844.26,96.46 -1712.47,96.46 -1711.64,97.28 -1154.18,97.28 -1111.24,54.35 -1111.24,51.2 -1104.51,44.47 M2.8@-1104.51,44.08
SIG0: J1.2 M3.30 | length 173
  Top Copper Layer w30: J1.2 -2275,695 -2214.42,634.42 M3.30
SIG1: J1.36 M4.15 | length 249.1
  Top Copper Layer w30: J1.36@-2275,887.91 -2275,1032.23 -2211.34,1095.89 -2211.34,1109.75 M4.15
SIG2: J1.3 M3.29 | length 243.6
  Top Copper Layer w30: J1.3 -2225,695.78 -2175.71,646.49 -2175.71,590.25 M3.29
SIG3: J1.37 M4.16 | length 169.7
  Top Copper Layer w30: J1.37@-2225,962.91 -2222.8,965.12 -2222.8,1033.66 -2171.97,1084.48 -2171.97,1109.75 M4.16
SIG4: J1.4 M3.28 | length 164.4
  Top Copper Layer w30: J1.4 -2175,696.56 -2135.23,656.78 M3.28
SIG5: J1.38 M4.17 | length 240.3
  Top Copper Layer w30: J1.38@-2175,887.91 -2175,1030.68 -2132.6,1073.08 -2132.6,1109.75 M4.17
SIG6: J1.5 M3.27 | length 235
  Top Copper Layer w30: J1.5 -2125,702.76 -2095.86,673.62 M3.27
SIG7: J1.39 M4.18 | length 160.9
  Top Copper Layer w30: J1.39@-2125,962.91 -2125,1029.9 -2092.57,1062.33 M4.18
SIG8: J1.6 M3.26 | length 155.6
  Top Copper Layer w30: J1.6 -2070.89,733.39 -2070.89,699.43 -2056.49,685.03 M3.26
SIG9: J1.40 M4.19 | length 231.5
  Top Copper Layer w30: J1.40@-2075,887.91 -2075,1020 -2053.86,1041.14 -2053.86,1109.75 M4.19
SIG10: J1.7 M3.25 | length 229
  Top Copper Layer w30: J1.7 -2028.35,809.15 -2028.35,707.67 -2017.12,696.44 M3.25
SIG11: J1.41 M4.20 | length 152.5
  Top Copper Layer w30: J1.41 -2025,1015 -2015.56,1024.44 -2015.56,1107.74 -2013.83,1109.48 M4.20
SIG12: J1.8 M3.24 | length 152.9
  Top Copper Layer w30: M3.24 -1977.75,717.25 -1979.11,715.89 -1979.11,733.39 J1.8
SIG13: J1.42 M4.21 | length 222.7
  Top Copper Layer w30: J1.42@-1975,887.91 -1974.73,888.18 -1974.73,1110.14 M4.21
SIG14: J1.9 M3.23 P_VREF.1 | length 793.1
  Top Copper Layer w30: M3.23 -1937.71,590.25 -1937.71,592.7 -1937.55,592.86 -1937.55,701.34 -1925,713.89 J1.9
  Bottom Copper Layer w30: P_VREF.1 -2035,425 -1938.38,521.62 -1938.38,583.24 M3.23
SIG15: J1.43 M4.22 | length 151.7
  Top Copper Layer w30: M4.22 -1934.43,1109.75 -1934.43,1107.3 -1934.26,1107.14 -1934.26,1013.9 -1925,1004.63 J1.43@-1925,962.91
SIG16: J1.10 M3.22 | length 159.8
  Top Copper Layer w30: M3.22@-1899.91,587.99 -1899.91,688.2 -1879.11,709 -1879.11,733.39 J1.10
SIG17: J1.44 M4.23 | length 231.5
  Top Copper Layer w30: M4.23 -1896.62,1109.48 -1894.89,1107.74 -1894.89,1025.3 -1875,1005.41 J1.44@-1875,887.91
SIG18: J1.11 M3.21 | length 237.6
  Top Copper Layer w30: M3.21 -1860.54,590.52 -1858.81,592.26 -1858.81,678.52 -1828.35,708.99 -1828.35,809.15 J1.11
SIG19: J1.45 M4.24 | length 160.9
  Top Copper Layer w30: M4.24 -1857.25,1109.48 -1855.52,1107.74 -1855.52,1036.71 -1839.09,1020.29 -1839.09,1019.84 -1829.11,1009.86 -1829.11,967.03 J1.45@-1825,962.91
SIG20: J1.12 M3.20 | length 165.2
  Top Copper Layer w30: M3.20@-1820.51,591.19 -1819.44,592.26 -1819.44,667.12 -1779.11,707.44 -1779.11,733.39 J1.12
SIG21: J1.46 M4.25 | length 240.3
  Top Copper Layer w30: M4.25 -1817.22,1109.75 -1817.22,1049.19 -1803.19,1035.16 -1803.19,1034.71 -1775,1006.52 J1.46@-1775,887.91
SIG22: J1.13 M3.19 | length 246.4
  Top Copper Layer w30: M3.19 -1781.8,653.98 -1728.35,707.43 -1728.35,809.15 J1.13
SIG23: J1.47 M4.26 | length 169.7
  Top Copper Layer w30: M4.26 -1778.51,1109.48 -1776.78,1107.74 -1776.78,1094.82 -1774.39,1092.43 -1774.39,1056.69 -1729.11,1011.41 -1729.11,967.03 J1.47@-1725,962.91
SIG24: J1.14 M3.18 | length 175.8
  Top Copper Layer w30: M3.18 -1742.43,642.57 -1679.11,705.89 -1679.11,733.39 J1.14
SIG25: J1.48 M4.27 | length 249.1
  Top Copper Layer w30: M4.27 -1738.48,1109.75 -1738.48,1071.56 -1678,1011.08 -1678,890.91 J1.48@-1675,887.91
SIG26: J1.15 M3.17 | length 255.2
  Top Copper Layer w30: M3.17 -1702.4,590.25 -1702.4,626.92 -1625,704.32 J1.15
SIG27: J1.49 M4.28 | length 178.5
  Top Copper Layer w30: M4.28 -1699.77,1109.48 -1697.59,1107.29 -1697.59,1081.45 -1629.11,1012.97 -1629.11,967.03 J1.49@-1625,962.91
SIG28: J1.16 M3.16 | length 183.4
  Top Copper Layer w30: M3.16@-1663.69,591.19 -1663.03,591.19 -1663.03,615.52 -1579.11,699.43 -1579.11,733.39 J1.16
SIG29: J1.50 M4.29 | length 257.7
  Top Copper Layer w30: M4.29 -1659.29,1109.75 -1659.29,1093.92 -1575,1009.64 J1.50@-1575,887.91
SIG30: J1.17 M3.15 | length 264.1
  Top Copper Layer w30: M3.15 -1623.66,590.25 -1623.66,604.11 -1525,702.77 J1.17
SIG31: J1.51 M4.30 | length 187.1
  Top Copper Layer w30: M4.30 -1619.92,1109.75 -1619.92,1105.33 -1529.11,1014.53 -1529.11,967.03 J1.51@-1525,962.91
SIG32: J1.18 M2.30 | length 187.1
  Top Copper Layer w30: J1.18 -1470.89,733.39 -1470.89,685.89 -1380.08,595.08 -1380.08,590.66 M2.30
SIG33: J1.52 M1.15 | length 264.1
  Top Copper Layer w30: J1.52 -1475,997.23 -1376.34,1095.89 -1376.34,1109.75 M1.15
SIG34: J1.19 M2.29 | length 257.7
  Top Copper Layer w30: J1.19 -1425,690.78 -1340.71,606.49 -1340.71,590.66 M2.29
SIG35: J1.53 M1.16 | length 183.4
  Top Copper Layer w30: J1.53 -1420.89,966.61 -1420.89,1000.57 -1336.97,1084.48 -1336.97,1108.81 M1.16@-1336.31,1108.81
SIG36: J1.20 M2.28 | length 178.5
  Top Copper Layer w30: J1.20 -1370.89,733.39 -1370.89,687.44 -1302.41,618.97 -1302.41,593.12 -1300.23,590.94 M2.28
SIG37: J1.54 M1.17 | length 255.2
  Top Copper Layer w30: J1.54 -1375,995.68 -1297.6,1073.08 -1297.6,1109.75 M1.17
SIG38: J1.21 M2.27 | length 249.1
  Top Copper Layer w30: J1.21 -1322,809.5 -1322,689.33 -1261.52,628.85 -1261.52,590.66 M2.27
SIG39: J1.55 M1.18 | length 175.8
  Top Copper Layer w30: J1.55 -1320.89,966.61 -1320.89,994.11 -1257.57,1057.43 M1.18
SIG40: J1.22 M2.26 | length 169.7
  Top Copper Layer w30: J1.22 -1270.89,733.39 -1270.89,689 -1225.61,643.73 -1225.61,607.99 -1223.22,605.59 -1223.22,592.67 -1221.49,590.94 M2.26
SIG41: J1.56 M1.19 | length 246.4
  Top Copper Layer w30: J1.56 -1271.65,890.85 -1271.65,992.57 -1218.2,1046.02 M1.19
SIG42: J1.23 M2.25 | length 240.3
  Top Copper Layer w30: J1.23 -1225,693.89 -1196.81,665.7 -1196.81,665.26 -1182.78,651.22 -1182.78,590.66 M2.25
SIG43: J1.57 M1.20 | length 165.2
  Top Copper Layer w30: J1.57 -1220.89,966.61 -1220.89,992.56 -1180.56,1032.88 -1180.56,1107.74 M1.20@-1179.49,1108.81
SIG44: J1.24 M2.24 | length 160.9
  Top Copper Layer w30: J1.24 -1170.89,733.39 -1170.89,690.56 -1160.91,680.57 -1160.91,680.13 -1144.48,663.7 -1144.48,592.67 -1142.75,590.94 M2.24
SIG45: J1.58 M1.21 | length 237.6
  Top Copper Layer w30: J1.58 -1171.65,890.85 -1171.65,991.01 -1141.19,1021.48 -1141.19,1107.74 -1139.46,1109.48 M1.21
SIG46: J1.25 M2.23 | length 231.5
  Top Copper Layer w30: J1.25 -1125,695 -1105.11,675.11 -1105.11,592.67 -1103.38,590.94 M2.23
SIG47: J1.59 M1.22 | length 159.8
  Top Copper Layer w30: J1.59 -1120.89,966.61 -1120.89,991 -1100.09,1011.8 M1.22@-1100.09,1112.01
SIG48: J1.26 M2.22 | length 151.7
  Top Copper Layer w30: J1.26 -1075,695.78 -1065.74,686.52 -1065.74,593.28 -1065.57,593.11 -1065.57,590.66 M2.22
SIG49: J1.60 M1.23 | length 228.5
  Top Copper Layer w30: J1.60 -1075,986.11 -1062.45,998.66 -1062.45,1107.14 -1062.29,1107.3 -1062.29,1109.75 M1.23
SIG50: J1.27 M2.21 | length 222.7
  Top Copper Layer w30: M2.21 -1025.27,590.27 -1025.27,812.23 J1.27
SIG51: J1.61 M1.24 | length 152.9
  Top Copper Layer w30: J1.61 -1020.89,966.61 -1020.89,984.11 -1022.25,982.75 M1.24
SIG52: J1.28 M2.20 | length 152.1
  Top Copper Layer w30: M2.20 -985.51,590.66 -985.51,593.11 -985,593.62 -985,662.07 -975,672.07 J1.28
SIG53: J1.62 M1.25 | length 229
  Top Copper Layer w30: M1.25 -982.88,1003.56 -971.65,992.33 -971.65,890.85 J1.62
SIG54: J1.29 M2.19 | length 231.5
  Top Copper Layer w30: M2.19 -946.14,590.66 -946.14,650.15 -925,671.29 J1.29
SIG55: J1.63 M1.26 | length 155.6
  Top Copper Layer w30: M1.26 -943.51,1014.97 -929.11,1000.57 -929.11,966.61 J1.63
SIG56: J1.30 M2.18 | length 160.9
  Top Copper Layer w30: M2.18 -907.43,638.08 -875,670.51 J1.30
SIG57: J1.64 M1.27 | length 235
  Top Copper Layer w30: M1.27 -904.14,1026.38 -875,997.24 J1.64
SIG58: J1.31 M2.17 | length 240.3
  Top Copper Layer w30: M2.17 -867.4,590.66 -867.4,627.34 -825,669.73 J1.31
SIG59: J1.65 M1.28 | length 164.4
  Top Copper Layer w30: M1.28 -864.77,1043.22 -825,1003.44 J1.65
SIG60: J1.32 M2.16 | length 169.7
  Top Copper Layer w30: M2.16 -828.03,590.66 -828.03,615.93 -777.2,666.75 -777.2,735.3 J1.32
SIG61: J1.66 M1.29 | length 243.6
  Top Copper Layer w30: M1.29 -824.29,1109.75 -824.29,1053.51 -775,1004.22 J1.66
SIG62: J1.33 M2.15 | length 249.1
  Top Copper Layer w30: M2.15 -788.66,590.66 -788.66,604.52 -725,668.18 J1.33
SIG63: J1.67 M1.30 | length 173
  Top Copper Layer w30: M1.30 -785.58,1065.58 -725,1005 J1.67
VDD: J_DIG.8 M1.4 M2.4 M3.4 M4.4 | length 5183.6
  Internal Copper Layer 1 w30: M3.4 -1781.36,41.08 -1781.36,93.76 -1395.12,480 -1345,480 ; v1@-950,485 v1(-947.03,482.03)
  Internal Copper Layer 1 w50: v1(-1725,1315) -1217.48,1315 v1(-1216.24,1316.24) -756.24,1316.24 -685.91,1245.91 -210.91,1245.91 J_DIG.8 ; -1345,480 v1@-950,480 ; v1@-947.03,480 -650,480 -610,520 v1(-610,800)
  Internal Copper Layer 2 w30: M4.4 -2052.97,1643.1 -1988.14,1578.27 -1971.65,1578.27 -1725,1331.61 v1(-1725,1315) ; M1.4 -1217.97,1361.72 -1225,1354.69 -1225,1325 v1(-1216.24,1316.24) ; M2.4 v1(-947.03,482.03)
  Internal Copper Layer 2 w50: v1(-610,800) -605.5,800 -378.19,1027.31 -378.19,1027.75 -208.8,1197.14 -167.86,1197.14 J_DIG.8
VREF: M1.14 M2.14 M3.14 M4.14 P_VREF.2 P_VREF_GND.1 | length 3535.2
  Top Copper Layer w30: P_VREF.2@-2380.67,525 -2386.6,525 -2395,533.39 -2395,1167.43 -2377.43,1185 -2189.32,1185 ; P_VREF.2@-2370,524.33 -2365.67,520 -1640.68,520 ; M4.14 -2249.39,1111.08 -2249.39,1124.93 -2189.32,1185 ; M3.14 -1585.61,588.92 -1585.61,575.07 -1640.68,520 ; M1.14 -1415.71,1111.08 -1415.71,1134.74 -1465.98,1185 -2189.32,1185 ; M2.14 -750.61,589.34 -750.61,575.48 -806.09,520 -1640.68,520
VSTIMN: J_DIG.4 M1.2 M2.2 M3.2 M4.2 | length 5147.2
  Internal Copper Layer 1 w30: M3.2 -1702.62,41.08 -1702.62,65.82 -1408.44,360 -1360,360 -1358.75,358.75 ; v1(-868.29,358.29) v1@-865,355
  Internal Copper Layer 1 w50: v1(-1940,1428.44) -1296.56,1428.44 v1(-1294.98,1430.02) -711.9,1430.02 -640.97,1359.09 -209.95,1359.09 -169.05,1400 J_DIG.4 ; -1358.75,358.75 v1@-868.29,358.75 ; v1@-865,358.75 -611.25,358.75 -498.19,471.81 v1(-498.19,1065.44)
  Internal Copper Layer 2 w30: M4.2 -2129.98,1657.85 -2129.98,1618.42 v1(-1940,1428.44) ; M1.2 -1294.98,1657.85 v1(-1294.98,1430.02) ; M2.2 v1(-868.29,358.29)
  Internal Copper Layer 2 w50: v1(-498.19,1065.44) -498.19,1065.87 -165,1399.06 J_DIG.4
VSTIMP: J_DIG.6 M1.3 M2.3 M3.3 M4.3 | length 5142.3
  Internal Copper Layer 1 w30: M3.3 -1742.66,41.35 -1740.93,43.08 -1740.93,78.3 -1399.22,420 -1350,420 ; v1@-910,425 v1(-907.66,422.66)
  Internal Copper Layer 1 w50: v1(-1835,1372.11) -733.08,1372.15 -662.75,1301.81 -166.81,1301.81 J_DIG.6 ; -1350,420 v1@-910,420 ; v1@-907.66,420 -629.06,420 -554.09,494.97 v1(-554.09,935.91)
  Internal Copper Layer 2 w30: M4.3 -2090.61,1657.85 -2090.61,1629.83 -1835,1374.22 v1(-1835,1372.11) ; M1.3 -1257.28,1659.53 v1(-1257.28,1373.19) ; M2.3 v1(-907.66,422.66)
  Internal Copper Layer 2 w50: v1(-554.09,935.91) -548.66,935.91 -434.09,1050.47 -434.09,1050.91 -187.86,1297.14 -167.86,1297.14 J_DIG.6
pads on no net: J1.34 J1.68 M1.13 M2.13 M3.13 M4.13

## Silkscreen, mask and mechanical layers (free items; w line width, h text height)
Bottom Overlay:
  text "UNIT V4 / G. O'Leary / N2BL 2020" at -2750,30 h30 r270
Top Courtyard:
  the board outline again, w7.8

## Text inside footprints (layer, text, board x,y; h text height)
J_DIG: Bottom Overlay "28" at -150.43,131.89 h40 r90; Bottom Overlay "27" at -44.13,131.89 h40 r90; Bottom Overlay "2" at -150.43,1595.67 h40 r90; Bottom Overlay "1" at -44.13,1583.86 h40 r90
L1: Top Overlay "Neuron" at -1813.15,302.32 h118.11; Top Overlay "Brain" at -1271.81,302.32 h118.11; Top Overlay "to" at -1409.61,302.32 h118.11; Top Overlay "2020" at -1114.33,243.27 h51.18; Top Overlay "LABORATORY" at -1813.15,243.27 h51.18